# Allegro board CC13xxEM_5XD_7793_4L.brd
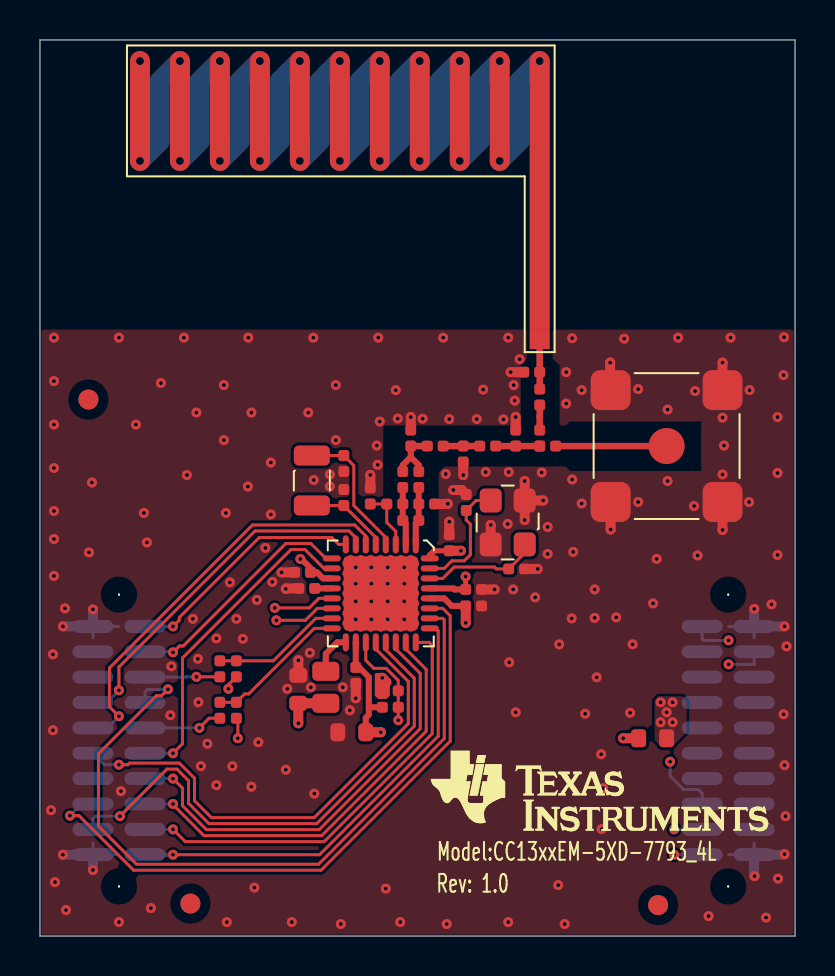
[diagram p0: board, top side]
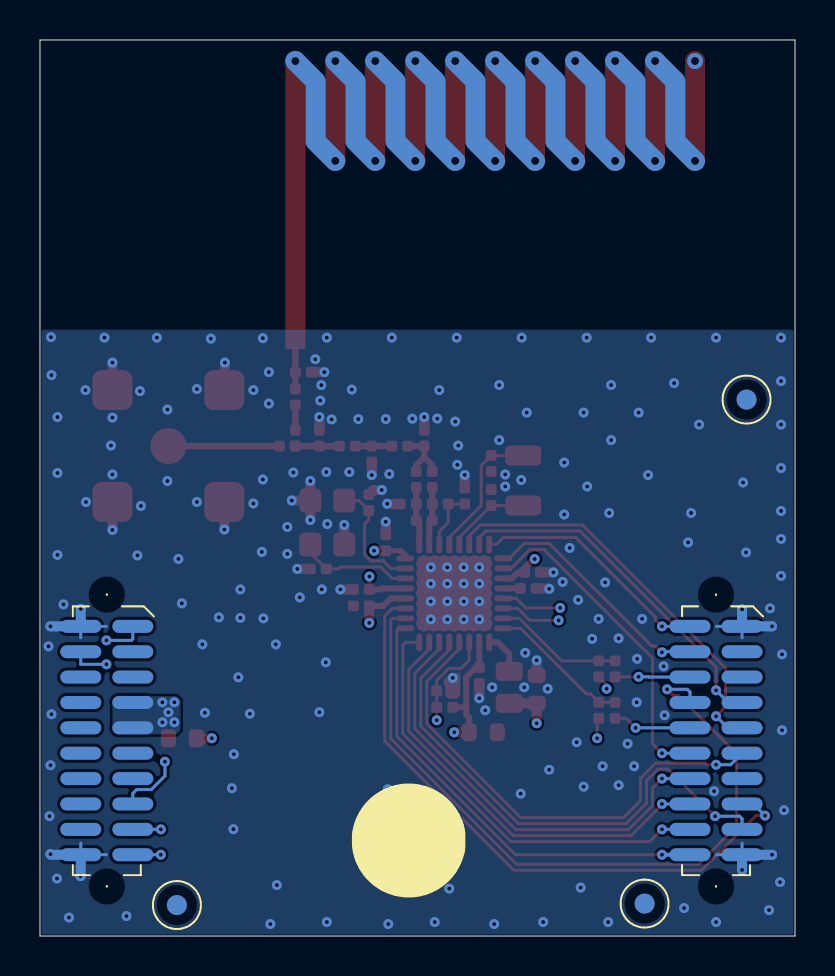
[diagram p1: board, bottom side, seen from below]

Outline 37.78 x 44.85 mm; copper layers: TOP, L2, L3, BOTTOM. Coordinates in mm from the lower left corner of the outline.
Outline path: 0,44.85 0,0 37.78,0 37.78,44.85 0,44.85

## Placement (name value [footprint] x y rotation side)
A1  Antenna PCB helix 868/915MHz  [ANTENNA868_915MHZ_MIRROR_A2N]  25 29.88 0 top
C3  100nF  [CAPC1005X60L]  13.54 18.2 180 top
C4  100nF  [CAPC1005X60L]  21.29 16.52 0 top
C5  22uF  [CAPC1608X100A2L]  16.3 10.2 180 top
C6  100nF  [CAPC1005X60L]  15.8 13.44 270 top
C8  22uF  [CAPC1608X100A2L]  12.93 11.65 90 top
C9  100nF  [CAPC1005X60L]  21.29 17.35 0 top
C11  3.6pF  [CAPC1005X60L]  19.75 21.62 180 top
C12  2.7pF  [CAPC1005X60L]  18.55 24.53 90 top
C13  6.2pF  [CAPC1005X60L]  21.18 23.72 90 top
C14  3pF  [CAPC1005X60L]  23.8 25.33 270 top
C15  100pF  [CAPC1005X60N]  25.8 24.53 180 top
C16  DNM_0402  [CAPC1005X60N]  25 25.33 270 top
C17  12pF  [CAPC1005X60L]  15.2 24.05 270 top
C18  12pF  [CAPC1005X60L]  15.2 21.55 90 top
C19  1uF  [CAPC1005X60L]  13.75 17.4 180 top
C20  100nF  [CAPC1005X60L]  17.93 12.28 180 top
C21  100pF  [CAPC1005X60L]  16.53 21.62 90 top
C22  3.6pF  [CAPC1005X60L]  18.15 22.45 90 top
C23  100nF  [CAPC1005X60L]  20.48 19.28 90 top
C24  DNM  [CAPC1005X60L]  21.33 21.3 90 top
C25  DNM  [CAPC1005X60L]  23.45 18.38 0 top
FIDU1  FIDU_1MM  [FID100X115]  7.53 1.62 0 top
FIDU2  FIDU_1MM  [FID100X115]  2.43 26.85 0 top
FIDU3  FIDU_1MM  [FID100X115]  30.93 1.55 0 top
FIDU4  FIDU_1MM  [FID100X115]  7.53 1.62 180 bottom
FIDU5  FIDU_1MM  [FID100X115]  2.43 26.85 180 bottom
FIDU6  FIDU_1MM  [FID100X115]  30.93 1.55 180 bottom
FL1  BLM18HE152SN1  [FIL_BLM18HE152SN1DL]  29.95 9.9 0 top
J1  SMA-10V21-TGG  [HUSTSAN_SMA10V21TGGAN]  31.35 24.53 0 top
L1  6.8uH  [INDC2012X150L]  14.3 13.25 270 top
L11  27nH  [INDC1005X60L]  18.15 20.8 0 top
L12  7.5nH  [INDC1005X60A2L]  18.95 22.45 90 top
L13  6.8nH  [INDC1005X60L]  19.38 24.53 0 top
L14  6.8nH  [INDC1005X60L]  22 24.53 0 top
L15  TBD  [INDC1005X60L]  25 28.22 180 top
L21  7.5nH  [INDC1005X60A2L]  17.35 21.62 0 top
NOREF  -  []  20.55 9.28 0 top
NOREF#2  -  []  0 44.08 0 top
NOREF#3  -  []  11.08 0 90 top
NOREF#4  -  []  27.45 5.8 180 bottom
P1  SFM-110-02-S-D-A-K-TR  [SAMTEC_SFM11002AN]  2.65 15.5 0 bottom
P2  SFM-110-02-S-D-A-K-TR  [SAMTEC_SFM11002AN]  33.13 15.5 0 bottom
R1  100k  [RESC1005X40L]  17.93 11.45 180 top
R2  0  [RESC1005X40L]  25 26.58 90 top
R3  DNM  [RESC1005X40L]  9.83 10.9 90 top
R4  DNM  [RESC1005X40L]  9.83 12.97 90 top
R5  0  [RESC1005X40N]  9 10.9 90 top
R6  0  [RESC1005X40N]  9 12.97 90 top
U1  CC13xx 5x5  [QFNFC50P500X500X100-33AN]  18.8 19.6 180 top
Y1  32.768kHz  [XTAL_FC-135N]  13.6 24.05 270 top
Y2  24MHz  [OSCCC250X320X80-4L]  24.25 19.6 90 top

## Library data of the parts
A1 = ANTENNA: User Part Number: #PN
C3 C4 C6 C9 C11-C25 = CAPACITOR: alternate symbols: (CAPC1005X60L,CAPC1005X60M)
C5 C8 = CAPACITOR: User Part Number: #PN; alternate symbols: (CAPC1608X100A2L,CAPC1608X100A2M)
FIDU1-FIDU6 = FIDMARK
FL1 = FILTER_2PIN: alternate symbols: (FIL_BLM18HE152SN1DL,FIL_BLM18HE152SN1DM)
J1 = CONN_COAX_1+4: alternate symbols: (HUSTSAN_SMA10V21TGGL,HUSTSAN_SMA10V21TGGM)
L1 = INDUCTOR: alternate symbols: (INDC2012X150L,INDC2012X150M)
L11 L15 = INDUCTOR: alternate symbols: (INDC1005X60M,INDC1005X60L)
L12 L21 = IND_HOR: User Part Number: #PN; alternate symbols: (INDC1005X60A2L,INDC1005X60A2M)
L13 L14 = INDUCTOR: alternate symbols: (INDC1005X60L,INDC1005X60M)
P1 P2 = CONN_HEADER_2X10_P_S: alternate symbols: (SAMTEC_SFM11002AL,SAMTEC_SFM11002AM)
R1-R6 = RESISTOR: alternate symbols: (RESC1005X40L,RESC1005X40M)
U1 = IC_RF_CC13XX_5X5_QFN32: alternate symbols: (QFNFC50P500X500X100-33AL,QFNFC50P500X500X100-33AM)
Y1 = CRYSTAL: alternate symbols: (XTAL_FC-135L,XTAL_FC-135M)
Y2 = XTAL_TSX_3225_V1: alternate symbols: (OSCCC250X320X80-4L,OSCCC250X320X80-4M)

## Footprints (pads in the part's own frame, mm; a bottom-side part is the same pattern mirrored in y, then rotated)
ANTENNA868_915MHZ_MIRROR_A2N
  rect 1x1 smd: 1(0,0)
CAPC1005X60L
  custom 0.55x0.54 smd: 1(0,0) 2(0.8,0)
CAPC1005X60N
  custom 0.55x0.54 smd: 1(0,0) 2(0.8,0)
CAPC1608X100A2L
  custom 0.75x0.9 smd: 1(0,0) 2(1.4,0)
FID100X115
  oval 1x1 smd: 1(0,0)
FIL_BLM18HE152SN1DL
  custom 0.75x0.9 smd: 1(0,0) 2(1.4,0)
HUSTSAN_SMA10V21TGGAN
  round 1.801 smd: 1(0,0)
  custom 2x2 smd: 2(-2.8,-2.8) 3(2.8,-2.8) 4(2.8,2.8) 5(-2.8,2.8)
INDC1005X60A2L
  custom 0.55x0.54 smd: 1(0,0) 2(0.8,0)
INDC1005X60L
  custom 0.55x0.54 smd: 1(0,0) 2(0.8,0)
INDC2012X150L
  custom 0.95x1.352 smd: 1(0,0) 2(1.6,0)
OSCCC250X320X80-4L
  custom 1.2x1.1 smd: 1(0,0) 2(2.2,0) 3(2.2,1.7) 4(0,1.7)
QFNFC50P500X500X100-33AN
  oval 0.3x0.9 smd: 1(0,0) 2(0.5,0) 3(1,0) 4(1.5,0) 5(2,0) 6(2.5,0) 7(3,0) 8(3.5,0) 17(3.5,4.9) 18(3,4.9) 19(2.5,4.9) 20(2,4.9) 21(1.5,4.9) 22(1,4.9) 23(0.5,4.9) 24(0,4.9)
  oval 0.9x0.3 smd: 9(4.2,0.7) 10(4.2,1.2) 11(4.2,1.7) 12(4.2,2.2) 13(4.2,2.7) 14(4.2,3.2) 15(4.2,3.7) 16(4.2,4.2) 25(-0.7,4.2) 26(-0.7,3.7) 27(-0.7,3.2) 28(-0.7,2.7) 29(-0.7,2.2) 30(-0.7,1.7) 31(-0.7,1.2) 32(-0.7,0.7)
  rect 3.55x3.55 smd: 33(1.75,2.45)
RESC1005X40L
  custom 0.55x0.54 smd: 1(0,0) 2(0.8,0)
RESC1005X40N
  custom 0.55x0.54 smd: 1(0,0) 2(0.8,0)
SAMTEC_SFM11002AN
  round 0.099 hole 1.501 unplated: (1.302,-1.588) (1.302,13.017)
  oval 2.05x0.65 smd: 1(0,0) 2(2.604,0) 3(0,1.27) 4(2.604,1.27) 5(0,2.54) 6(2.604,2.54) 7(0,3.81) 8(2.604,3.81) 9(0,5.08) 10(2.604,5.08) 11(0,6.35) 12(2.604,6.35) 13(0,7.62) 14(2.604,7.62) 15(0,8.89) 16(2.604,8.89) 17(0,10.16) 18(2.604,10.16) 19(0,11.43) 20(2.604,11.43)
XTAL_FC-135N
  custom 1x1.8 smd: 1(0,0) 2(2.5,0)

## Nets
GND: C3.2 C4.2 C5.2 C6.2 C8.2 C9.2 C11.1 C12.2 C13.1 C14.1 C17.2 C18.2 C19.2 C20.2 C21.2 C23.2 C24.2 C25.2 J1.2 J1.3 J1.4 J1.5 L15.2 P1.1 P1.19 P2.2 P2.20 U1.33(VSS) Y2.2 Y2.4
VDD_EB: FL1.2 P2.7 P2.9
VDDR: C8.1 C9.1 C23.1 L1.2 U1.29(VDDR#29) U1.32(VDDR#32)
VDDS: C3.1 C4.1 C5.1 C6.1 FL1.1 R1.2 U1.11(VDDS2) U1.18(VDDS_DCDC) U1.28(VDDS)
DCDC_SW: L1.1 U1.17(DCDC_SW)
DIO_0: P1.9 U1.6(DIO_0)
DIO_1: P1.7 U1.7(DIO_1)
DIO_2: P1.2 U1.8(DIO_2)
DIO_3: P1.4 U1.9(DIO_3)
DIO_4: P1.12 U1.10(DIO_4)
DIO_5: P1.6 R6.1
DIO_5/JTAG_TDO: R4.2 R6.2 U1.15(DIO_5)
DIO_6: P1.10 R5.1
DIO_6/JTAG_TDI: R3.2 R5.2 U1.16(DIO_6)
DIO_7: P1.11 U1.20(DIO_7)
DIO_8: P1.17 U1.21(DIO_8)
DIO_9: P1.14 U1.22(DIO_9)
DIO_10: P1.16 U1.23(DIO_10)
DIO_11: P1.18 U1.24(DIO_11)
DIO_12: P1.20 U1.25(DIO_12)
DIO_13: P1.8 U1.26(DIO_13)
DIO_14: P1.15 U1.27(DIO_14)
JTAG_TCK: P2.1 U1.14(JTAG_TCKC)
JTAG_TDI: P2.17 R3.1
JTAG_TDO: P2.19 R4.1
JTAG_TMS: P2.4 U1.13(JTAG_TMSC)
NRESET: C20.1 P2.15 R1.1 U1.19(RESET_N)
N310061: C24.1 U1.31(X24M_N) Y2.3
N310119: C25.1 U1.30(X24M_P) Y2.1
N320943: C17.1 U1.4(X32K_Q1) Y1.1
N320947: C18.1 U1.5(X32K_Q2) Y1.2
N476264: C21.1 L21.1 U1.3(RX_TX)
N498187: C19.1 U1.12(DCOUPL)
N501083: C11.2 L11.2 L12.1 U1.1(RF_P)
N501087: C22.1 L11.1 L21.2 U1.2(RF_N)
N501143: C14.2 C15.2 C16.2 L14.2
N501295: C15.1 J1.1
N501307: C12.1 C22.2 L12.2 L13.1
N501319: C13.2 L13.2 L14.1
N501343: A1.1(FEED/GND_1) L15.1 R2.2
N501473: C16.1 R2.1

Pads without a net: FIDU1 1; FIDU2 1; FIDU3 1; FIDU4 1; FIDU5 1; FIDU6 1; P1 3 5 13; P2 3 5 6 8 10 11 12 13 14 16 18

## Via types
v1: diameter 0.5, hole 0.2, TOP to BOTTOM, 237 vias
v2: diameter 0.8, hole 0.4, TOP to BOTTOM, 21 vias

## Routing (per net, layer and track width the routed paths; a pad name or vN(x,y) marks a point on that pad's centre or on a via; arc(x,y) is an arc through that point)
GND: length 36.5
  TOP w0.5: Y2.2 v1(24.25,20.82) ; Y2.2 v1(25.18,21.8) ; Y2.2 v1(24.25,22.78) ; v1(34.15,20.33) 34.15,21.72 ; C25.2 v1(24.9,18.38) ; Y2.4 v1(22.55,20.58) ; C23.2 v1(20.48,20.74) ; v1(18.55,25.97) C12.2 ; C6.2 v1(15.8,11.9) ; v1(23.8,25.98) C14.1 ; C21.2 v1(16.53,23.08) ; v1(28.53,28.7) 28.53,27.35 J1.5 ; C20.2 v1(17.12,12.92) ; C13.1 v1(21.18,23.07) ; C8.2 v1(12.93,13.8) ; v1(20.68,22.33) 21.1,22.33 C24.2 ; v1(12.09,18.2) C3.2 ; 28.55,21.72 v1(28.55,20.35) ; J1.4 v1(34.15,28.7) ; L15.2 v1(23.55,28.22) ; C11.1 20.39,21.62 v1(20.4,21.64) ; C9.2 v1(22.75,17.35) ; C19.2 12.32,17.4 v1(12.3,17.38)
  BOTTOM w0.15: 2.65,14.92 P1.1 3.93,15.5 ; 2.65,4.65 P1.19 3.93,4.07 ; 34.46,15.5 P2.2 35.73,14.92 ; 35.73,4.65 P2.20 34.46,4.07
  BOTTOM w0.5: v1(37.25,15.5) P2.2 v1(35.73,16.38) ; v1(1.15,4.07) P1.19 v1(2.65,3.31) ; v1(35.75,3) 35.73,3.02 P2.20 37.22,4.07 v1(37.25,4.1) ; v1(1.15,15.5) P1.1 v1(2.65,16.35)
  vias: v1(0.55,6.3) v1(0.7,29.95) v1(0.7,27.78) v1(0.7,25.6) v1(0.7,23.42) v1(0.7,21.28) v1(0.7,19.88) v1(0.7,18.03) v1(0.65,14.1) v1(0.65,10.3) v1(0.75,2.7) v1(1.25,16.4) v1(1.3,1.3) v1(2.45,19.2) v1(2.6,22.7) v1(3.95,29.95) v1(3.95,0.7) v1(4.05,7.25) v1(4.8,25.6) v1(5.2,21.17) v1(5.35,19.7) v1(5.55,1.4) v1(6.05,27.67) v1(6.58,13.5) v1(6.53,11.05) v1(7.2,29.95) v1(7.35,23.08) v1(7.65,15.88) v1(7.82,26.2) v1(7.9,13.88) v1(7.93,11.7) v1(8.05,8.5) v1(8.38,9.62) v1(8.83,14.9) v1(8.83,7.55) v1(9.2,27.58) v1(9.2,24.82) v1(9.3,21.17) v1(9.35,0.7) v1(9.5,17.7) v1(9.62,8.5) v1(9.83,15.88) v1(10.15,14.88) v1(10.43,29.95) v1(10.4,22.5) v1(10.58,26.2) v1(10.58,7.47) v1(10.73,2.42) v1(10.85,16.83) v1(10.93,9.7) v1(11.28,19.42) v1(11.55,23.7) v1(11.55,21.1) v1(11.62,17.72) v1(12.38,12.38) v1(12.3,8.33) v1(12.6,0.7) v1(13.42,26.2) v1(13.5,14.17) v1(13.55,12.45) v1(13.68,29.95) v1(13.7,22.83) v1(13.73,7.12) v1(14.5,23.1) v1(14.5,22.5) v1(14.8,27.58) v1(14.8,24.82) v1(15.05,0.6) v1(15.15,12.45) v1(15.5,11.3) v1(15.8,18.45) v1(15.8,17.64) v1(15.8,16.75) v1(15.8,15.85) v1(16.57,18.45) v1(16.57,17.64) v1(16.57,16.75) v1(16.57,15.85) v1(16.85,24.55) v1(16.89,23.58) v1(16.93,29.95) v1(17,25.75) v1(17.4,18.45) v1(17.4,17.64) v1(17.4,16.75) v1(17.4,15.85) v1(17.3,2.38) v1(17.8,27.33) v1(17.9,25.9) v1(18.03,0.7) v1(18.22,18.45) v1(18.22,17.64) v1(18.22,16.75) v1(18.22,15.85) v1(19.15,25.89) v1(20.18,29.95) v1(20.3,23.12) v1(20.38,7.35) v1(20.35,0.6) v1(20.48,25.88) v1(21.85,25.88) v1(22.18,27.35) v1(22.3,23.22) v1(23.18,25.86) v1(23.43,29.95) v1(23.45,23.22) v1(23.4,20.62) v1(23.47,13.7) v1(23.43,0.7) v1(23.68,17.35) v1(23.7,27.58) v1(23.75,26.8) v1(23.8,11.2) v1(24,28.87) v1(24.78,16.95) v1(25.1,23.2) v1(25.4,20.47) v1(25.4,19.12) v1(25.97,14.6) v1(25.93,2.55) v1(26.25,0.6) v1(26.33,28.22) v1(26.33,26.65) v1(26.6,15.9) v1(26.62,29.92) v1(26.62,22.85) v1(26.68,19.22) v1(27.1,27.33) v1(27.1,21.65) v1(27.28,11.12) v1(27.75,17.35) v1(27.75,15.92) v1(27.85,12.95) v1(28.08,9.1) v1(28.1,5.35) v1(28.18,7.4) v1(28.83,15.95) v1(29.22,29.9) v1(29.53,11.17) v1(29.65,14.6) v1(29.93,27.38) v1(29.93,21.72) v1(30.68,16.65) v1(30.85,18.88) v1(31.4,26.35) v1(31.4,22.78) v1(31.93,29.95) v1(32.78,27.28) v1(32.72,21.53) v1(32.9,19.05) v1(33.45,1) v1(34.15,25.95) v1(34.15,23.1) v1(34.22,24.55) v1(34.55,29.95) v1(35.5,27.33) v1(35.47,21.72) v1(36.33,0.92) v1(36.6,16.6) v1(36.9,25.97) v1(36.9,23.17) v1(36.9,19.08) v1(36.93,2.88) v1(37.22,29.97) v1(37.2,28.08) v1(37.2,11.1) v1(37.25,8.55) v1(37.35,14.5) v1(37.3,6)
VDD_EB:
  vias: v1(31.05,11.7) v1(31.05,10.7) v1(31.35,11.2) v1(31.65,11.7) v1(31.65,10.7)
VDDR: length 21.9
  TOP w0.25: C9.1 v1(21.29,18) ; 19.73,19.28 C23.1
  TOP w0.3: U1.32 19.5,19.05 19.73,19.28 ; C9.1 20.74,17.35 20.69,17.4 U1.29
  TOP w0.5: C23.1 v1(21.06,19.28) ; L1.2 C8.1 v1(12.93,10.65)
  L3 w0.5: v1(12.93,10.65) 16.58,10.65 18.03,12.1 18.65,12.1 21.95,15.41 21.95,17.34 v1(21.29,18) 21.06,18.23 v1(21.06,19.28)
VDDS: length 49.5
  TOP w0.3: 16.45,11.45 16.45,12.96 15.97,13.44 C6.1 15.8,14.7 U1.18 ; 16.45,11.45 16.45,11.08 16.3,10.93 C5.1 ; 16.45,11.45 R1.2 ; C4.1 20.61,16.52 20.23,16.9 U1.28 ; U1.11 14.16,17.9 13.86,18.2 C3.1 13.54,18.41 13.08,18.87 v1(13.03,18.87)
  TOP w0.5: C5.1 v1(17.05,10.2) ; C4.1 21.3,16.51 v1(21.3,15.67) ; FL1.1 v1(29.18,9.9)
  L3 w0.5: 17.05,9.3 17.05,9.3 v1(17.05,10.2) ; 17.05,9.3 27.36,9.3 27.96,9.9 v1(29.18,9.9) ; 17.05,9.3 13.36,9.3 11.7,10.95 11.7,14.75 12.15,15.2 ; 12.15,15.2 13.03,16.08 v1(13.03,18.87) ; 12.15,15.2 12.52,14.83 20.45,14.83 v1(21.3,15.67)
DCDC_SW: length 2.1
  TOP w0.3: U1.17 14.87,14.7 14.3,14.13 L1.1
DIO_0: length 20.6
  TOP w0.15: v1(3.95,11) 3.48,11.47 3.48,13.42 10.63,20.58 15.75,20.58 16.14,20.19 16.14,20.19 16.3,20.03 U1.6
  BOTTOM w0.15: v1(3.95,11) 3.37,10.42 P1.9
DIO_1: length 17.9
  TOP w0.15: v1(3.95,12.3) 3.95,13.47 10.76,20.28 15.46,20.28 15.8,19.93 U1.7
  BOTTOM w0.15: v1(3.95,12.3) 3.34,11.69 P1.7
DIO_2: length 12.1
  TOP w0.15: U1.8 14.95,19.6 14.6,19.95 10.97,19.95 6.98,15.95 6.98,15.82 v1(6.66,15.5)
  BOTTOM w0.15: P1.2 v1(6.66,15.5)
DIO_3: length 11.9
  TOP w0.15: U1.9 14.3,18.9 13.55,19.65 12.3,19.65 7.17,14.52 6.98,14.52 v1(6.66,14.2)
  BOTTOM w0.15: P1.4 6.63,14.23 v1(6.66,14.2)
DIO_4: length 16.5
  TOP w0.15: v1(6.66,9.15) 7.13,9.62 7.13,13.92 12.56,19.35 13.26,19.35 14.2,18.4 U1.10
  BOTTOM w0.15: P1.12 v1(6.66,9.15)
DIO_5: length 3.8
  TOP w0.15: R6.1 v1(7.83,12.97)
  BOTTOM w0.15: P1.6 7.3,12.96 7.32,12.97 v1(7.83,12.97)
DIO_5/JTAG_TDO: length 6.5
  TOP w0.15: U1.15 13.8,15.9 11.68,13.78 9,13.78
DIO_6: length 3.9
  TOP w0.15: R5.1 8.46,10.9 v1(7.98,10.42)
  BOTTOM w0.15: P1.10 v1(7.98,10.42)
DIO_6/JTAG_TDI: length 7.1
  TOP w0.15: R5.2 R3.2 9.83,11.7 10.24,12.12 10.44,12.12 13.73,15.4 U1.16
DIO_7: length 24.5
  TOP w0.15: U1.20 16.8,14.37 18.43,12.74 18.43,10.63 13.72,5.92 8.58,5.92 7.73,6.77 7.73,7.9 6.98,8.66 4.48,8.66 4.4,8.58 v1(3.95,8.58)
  BOTTOM w0.15: v1(3.95,8.58) 3.23,8.58 P1.11
DIO_8: length 26.2
  TOP w0.15: v1(4,6) 6.36,8.36 6.85,8.36 7.43,7.78 7.43,6.65 8.45,5.62 13.84,5.62 18.73,10.51 18.73,12.9 17.3,14.33 U1.21
  BOTTOM w0.15: P1.17 2.65,5.87 2.78,6 v1(4,6)
DIO_9: length 22.3
  TOP w0.15: U1.22 17.8,14.37 19.03,13.14 19.03,10.38 13.97,5.33 8.33,5.33 7.13,6.52 7.13,7.41 v1(6.66,7.88)
  BOTTOM w0.15: P1.14 v1(6.66,7.88)
DIO_10: length 21.8
  TOP w0.15: v1(6.66,6.61) 6.66,6.57 8.2,5.03 14.09,5.03 19.33,10.26 19.33,13.34 18.3,14.37 U1.23
  BOTTOM w0.15: P1.16 v1(6.66,6.61)
DIO_11: length 22.2
  TOP w0.15: v1(6.66,5.34) 7.27,4.72 14.22,4.72 19.62,10.13 19.62,14.55 19.48,14.7 U1.24
  BOTTOM w0.15: P1.18 v1(6.66,5.34)
DIO_12: length 22.9
  TOP w0.15: U1.25 19.8,15.4 19.93,15.28 19.93,10.01 13.99,4.07 v1(6.66,4.07)
  BOTTOM w0.2: P1.20 v1(6.66,4.07)
DIO_13: length 37.6
  TOP w0.15: v1(6.4,12.35) 6.08,12.03 5.83,12.03 2.93,9.12 2.93,5.5 4.83,3.59 13.94,3.59 20.23,9.88 20.23,15.83 20.15,15.9 U1.26
  BOTTOM w0.15: P1.8 5.25,12.22 5.39,12.35 v1(6.4,12.35)
DIO_14: length 31.7
  TOP w0.15: U1.27 20.15,16.4 20.53,16.03 20.53,9.76 14.06,3.3 4.68,3.3 1.95,6.03 v1(1.5,6.03)
  BOTTOM w0.15: v1(1.5,6.03) 2.1,6.62 2.64,6.62 P1.15
JTAG_TCK: length 39.5
  TOP w0.15: v1(11.83,15.8) 13.28,15.8 13.88,16.4 U1.14
  L3 w0.15: v1(34.45,14.8) 33.97,14.33 33.97,10.5 31.72,8.25 13.73,8.25 11.23,10.76 11.23,15.2 v1(11.83,15.8)
  BOTTOM w0.15: P2.1 33.13,14.87 33.2,14.8 v1(34.45,14.8)
JTAG_TDI: length 26.5
  TOP w0.15: R3.1 9.83,10.89 9.9,10.82 v1(9.9,9.9)
  L3 w0.15: v1(31.73,5.34) 31.26,4.88 14.93,4.88 v1(9.9,9.9)
  BOTTOM w0.15: P2.17 v1(31.73,5.34)
JTAG_TDO: length 29.5
  TOP w0.15: v1(9.43,12.38) 9.43,12.58 R4.1
  L3 w0.15: v1(31.73,4.07) 15.06,4.07 9.43,9.7 v1(9.43,12.38)
  BOTTOM w0.15: P2.19 v1(31.73,4.07)
JTAG_TMS: length 39.9
  TOP w0.15: U1.13 13.95,16.9 13.48,16.42 v1(11.75,16.42)
  L3 w0.15: v1(34.45,13.6) 34.45,10.55 31.85,7.95 13.61,7.95 10.93,10.63 10.93,15.6 v1(11.75,16.42)
  BOTTOM w0.15: P2.4 35.73,13.6 v1(34.45,13.6)
Net_63:
  vias: v2(23,38.8) v2(25,43.79)
Net_64:
  vias: v2(5,43.79) v2(5,38.8) v2(7,43.79)
Net_65:
  vias: v2(7,38.8) v2(9,43.79)
Net_66:
  vias: v2(9,38.8) v2(11,43.79)
Net_67:
  vias: v2(11,38.8) v2(13,43.79)
Net_68:
  vias: v2(13,38.8) v2(15,43.79)
Net_69:
  vias: v2(15,38.8) v2(17,43.79)
Net_70:
  vias: v2(17,38.8) v2(19,43.79)
Net_71:
  vias: v2(19,38.8) v2(21,43.79)
Net_72:
  vias: v2(21,38.8) v2(23,43.79)
NRESET: length 22.6
  TOP w0.15: v1(17.93,10.8) R1.1 C20.1 17.93,12.79 17.32,13.4 16.7,13.4 16.3,13.8 U1.19
  L3 w0.15: v1(17.93,10.8) 18.51,10.8 18.71,10.6 29.65,10.6 v1(31.53,8.72)
  BOTTOM w0.15: v1(31.53,8.72) 31.53,8.01 32.2,7.33 32.94,7.33 33.13,7.14 P2.15
N310061: length 6.1
  TOP w0.15: U1.31 20.23,18.4 20.61,18.78 21.23,18.78 21.53,19.09 21.53,20.61 21.33,20.82 C24.1 21.33,21.31 21.82,21.8 Y2.3
N310119: length 5.8
  TOP w0.15: U1.30 20.15,17.9 20.72,18.47 22.74,18.47 22.83,18.38 C25.1 23.46,18.38 24.25,19.17 Y2.1
N320943: length 6.9
  TOP w0.15: U1.4 17.3,19.95 15.7,21.55 15.7,23.55 C17.1 Y1.1
N320947: length 4.2
  TOP w0.15: Y1.2 C18.1 15.2,21.55 16.26,20.48 16.27,20.48 16.8,19.95 U1.5
N476264: length 3
  TOP w0.15: C21.1 L21.1 17.35,20.7 17.8,20.25 U1.3
N498187: length 0.9
  TOP w0.3: U1.12 C19.1
N501083: length 2.9
  TOP w0.3: U1.1 18.8,20.65 L11.2 C11.2 L12.1
N501087: length 2.9
  TOP w0.3: C22.1 L21.2 L11.1 18.3,20.65 U1.2
N501143: length 2.2
  TOP w0.32: C16.2 C14.2 L14.2
N501295: length 5.5
  TOP w0.32: C15.1 J1.1
N501307: length 3.2
  TOP w0.3: C12.1 18.55,23.97 ; 18.55,23.97 18.15,23.57 C22.2 ; 18.55,23.97 18.95,23.57 L12.2
  TOP w0.32: C12.1 L13.1
N501319: length 1.8
  TOP w0.32: L14.1 C13.2 L13.2
N501343: length 2.5
  TOP w0.32: R2.2 25,28.22 L15.1 A1.1
N501473: length 1.3
  TOP w0.32: R2.1 25,26.02 25,26.01 C16.1

## Copper pours and planes (outline as drawn; the poured copper is in the pictures)
GND on TOP: 0.08,0.08 0.08,30.35 37.7,30.35 37.7,0.08 ; 3 cut-outs
GND on BOTTOM, L2: 0.08,0.08 0.08,30.35 37.7,30.35 37.7,0.08
GND on L3: 0.08,0.08 0.08,30.35 37.7,30.35 37.7,0.08 ; 2 cut-outs
VDD_EB on TOP: 30.95,12 32.15,12 32.35,11.8 32.35,10.2 31.65,9.5 31.05,9.5 30.75,9.8 30.75,11.8
VDD_EB on BOTTOM: 30.95,12 33.95,12 34.15,11.8 34.15,10.3 33.95,10.1 30.95,10.1 30.75,10.3 30.75,11.8
Net_63 on BOTTOM (solid shape): 24.65,44.15 25.35,44.15 25.35,43.44 24.49,42.57 24.49,39.78 24.45,39.59 24.34,39.43 23.36,38.44 22.65,38.44 22.65,39.15 23.49,39.99 23.49,42.78 23.52,42.97 23.63,43.13
Net_64 on BOTTOM (solid shape): 6.65,44.15 7.36,44.15 7.36,43.44 6.49,42.57 6.49,39.78 6.45,39.59 6.34,39.43 5.36,38.44 4.65,38.44 4.65,39.15 5.49,39.99 5.49,42.78 5.53,42.97 5.64,43.13
Net_65 on BOTTOM (solid shape): 8.65,44.15 9.35,44.15 9.35,43.44 8.49,42.57 8.49,39.78 8.45,39.59 8.34,39.43 7.36,38.44 6.65,38.44 6.65,39.15 7.49,39.99 7.49,42.78 7.53,42.97 7.63,43.13
Net_66 on BOTTOM (solid shape): 10.65,44.15 11.36,44.15 11.36,43.44 10.49,42.57 10.49,39.78 10.45,39.59 10.34,39.43 9.36,38.44 8.65,38.44 8.65,39.15 9.49,39.99 9.49,42.78 9.53,42.97 9.64,43.13
Net_67 on BOTTOM (solid shape): 12.65,44.15 13.35,44.15 13.36,43.44 12.49,42.57 12.49,39.78 12.45,39.59 12.34,39.43 11.36,38.44 10.65,38.44 10.65,39.15 11.49,39.99 11.49,42.78 11.53,42.97 11.63,43.13
Net_68 on BOTTOM (solid shape): 14.65,44.15 15.36,44.15 15.36,43.44 14.49,42.57 14.49,39.78 14.45,39.59 14.34,39.43 13.36,38.44 12.65,38.44 12.65,39.15 13.49,39.99 13.49,42.78 13.53,42.97 13.64,43.13
Net_69 on BOTTOM (solid shape): 16.65,44.15 17.35,44.15 17.36,43.44 16.49,42.57 16.49,39.78 16.45,39.59 16.34,39.43 15.36,38.44 14.65,38.44 14.65,39.15 15.49,39.99 15.49,42.78 15.53,42.97 15.63,43.13
Net_70 on BOTTOM (solid shape): 18.65,44.15 19.35,44.15 19.35,43.44 18.49,42.57 18.49,39.78 18.45,39.59 18.34,39.43 17.36,38.44 16.65,38.44 16.65,39.15 17.49,39.99 17.49,42.78 17.53,42.97 17.63,43.13
Net_71 on BOTTOM (solid shape): 20.65,44.15 21.36,44.15 21.36,43.44 20.49,42.57 20.49,39.78 20.45,39.59 20.34,39.43 19.36,38.44 18.65,38.44 18.65,39.15 19.49,39.99 19.49,42.78 19.53,42.97 19.64,43.13
Net_72 on BOTTOM (solid shape): 22.65,44.15 23.35,44.15 23.36,43.44 22.49,42.57 22.49,39.78 22.45,39.59 22.34,39.43 21.36,38.44 20.65,38.44 20.65,39.15 21.49,39.99 21.49,42.78 21.53,42.97 21.63,43.13
GND on TOP (solid shape): 17.19,13.17 17.22,13.16 17.26,13.14 17.54,12.85 17.57,12.82 17.57,12.79 17.58,12.64 17.57,12.6 17.56,12.59 17.51,12.5 17.5,12.41 17.5,12.14 17.5,12.08 17.49,12.03 17.35,11.89 17.31,11.87 17.27,11.87 16.98,11.87 16.94,11.87 16.91,11.88 16.78,12 16.76,12.03 16.75,12.07 16.75,13.07 16.78,13.14 16.85,13.17
GND on TOP (solid shape): outline of 216 points within 15.14,15.24 18.96,19.06
Net_63 on TOP (solid shape): 24.5,43.79 25,44.29 25.5,43.79 25.5,30.38 24.5,30.38
Net_63 on TOP (solid shape): 22.5,43.79 23,44.29 23.5,43.79 23.5,38.8 23,38.3 22.5,38.8
Net_64 on TOP (solid shape): 4.5,43.79 5,44.29 5.5,43.79 5.5,38.8 5,38.3 4.5,38.8
Net_65 on TOP (solid shape): 6.5,43.79 7,44.29 7.5,43.79 7.5,38.8 7,38.3 6.5,38.8
Net_66 on TOP (solid shape): 8.5,43.79 9,44.29 9.5,43.79 9.5,38.8 9,38.3 8.5,38.8
Net_67 on TOP (solid shape): 10.5,43.79 11,44.29 11.5,43.79 11.5,38.8 11,38.3 10.5,38.8
Net_68 on TOP (solid shape): 12.5,43.79 13,44.29 13.5,43.79 13.5,38.8 13,38.3 12.5,38.8
Net_69 on TOP (solid shape): 14.5,43.79 15,44.29 15.5,43.79 15.5,38.8 15,38.3 14.5,38.8
Net_70 on TOP (solid shape): 16.5,43.79 17,44.29 17.5,43.79 17.5,38.8 17,38.3 16.5,38.8
Net_71 on TOP (solid shape): 18.5,43.79 19,44.29 19.5,43.79 19.5,38.8 19,38.3 18.5,38.8
Net_72 on TOP (solid shape): 20.5,43.79 21,44.29 21.5,43.79 21.5,38.8 21,38.3 20.5,38.8

## Text on the board
Ref Des/Silkscreen Top: Rev: 1.0 | Model:CC13xxEM-5XD-7793_4L
XSECTION_CHART: *  SURFACE - AIR 0 MM | L1: TOP CONDUCTOR - COPPER 0.035 MM | *  DIELECTRIC - FR-4 0.175 MM | L2: L2 CONDUCTOR - COPPER 0.018 MM | *  DIELECTRIC - FR-4 1.14 MM | L3: L3 CONDUCTOR - COPPER 0.018 MM | L4: BOTTOM CONDUCTOR - COPPER 0.035 MM | DESIGN CROSS SECTION CHART | ___________________________ | TOTAL THICKNESS 1.596 MM
DIMENSION: FIGURE | SIZE | 0.2 | 0.4 | 1.501 | DRILL CHART: TOP to BOTTOM | ALL UNITS ARE IN MILLIMETERS | PLATED | NON-PLATED | QTY | 237 | 21 | 4
